# Altium PCB V2.1.PcbDoc (part 2 of 3)
Units mil, origin at the board's own origin, x right, y up, seen from the top; angles counter-clockwise.
Board outline 6653.54 x 3031.5 mil, 4 copper layers (Top Layer, 地, 电源, Bottom Layer); 355 components, 238 nets, 1139 pads, 340 vias.
Unrouted connection lines stored in the file: 1.
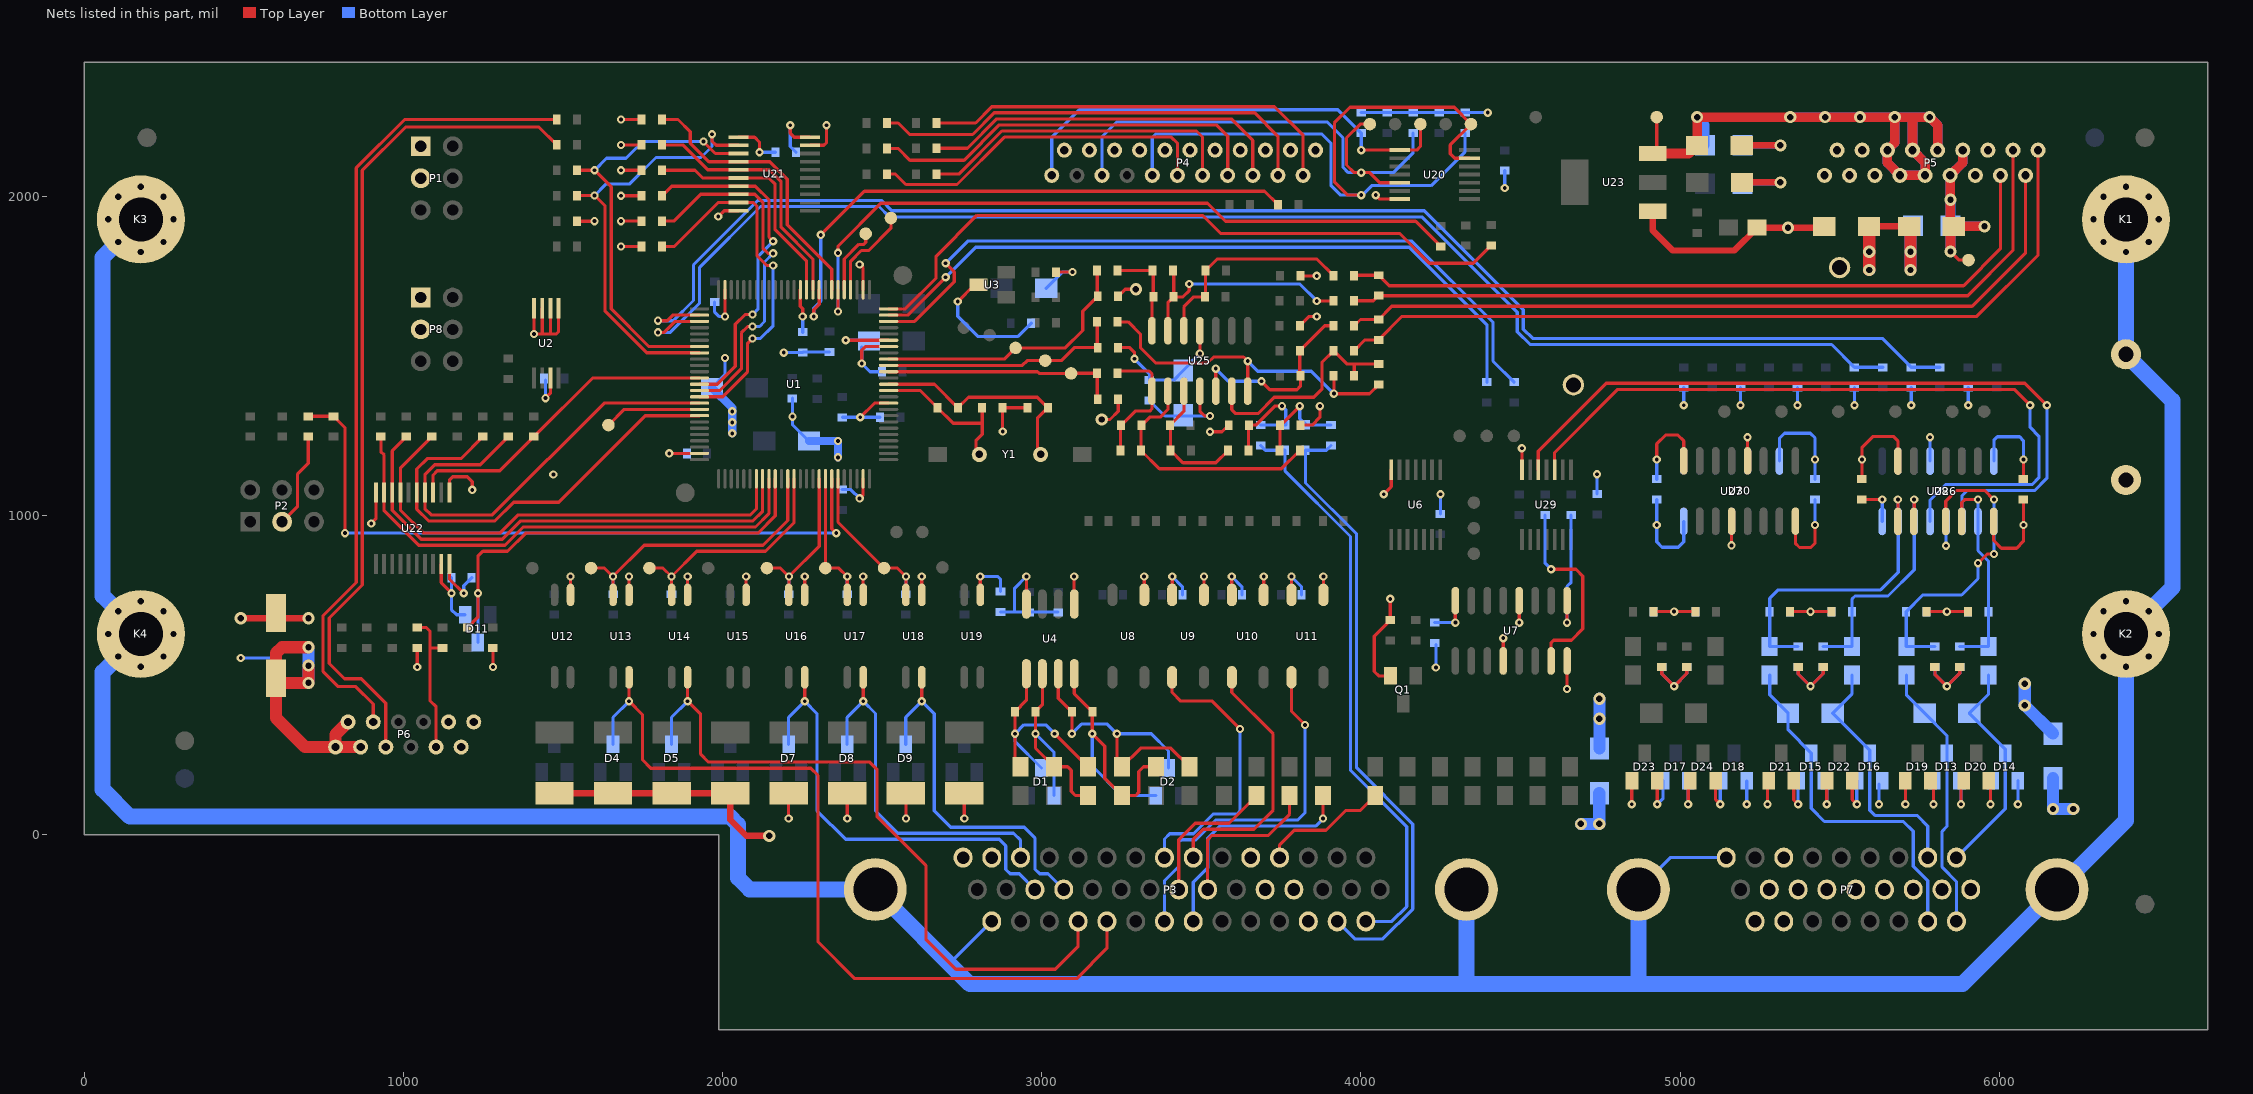
[diagram p4: the nets of this part, all layers, seen from the top]

## Via types
v1: diameter 26, hole 12, Top Layer to Bottom Layer, 308 vias
v2: diameter 38, hole 20, Top Layer to Bottom Layer, 32 vias

## Nets (pads, with @x,y where several pads share a name; then routed paths per layer and width w, separated by ;. In a path a pad name is that pad's centre, name@x,y a point inside that pad or via, vN(x,y) a via of type N, cw(c..) or ccw(c..) an arc to the next point about the centre after c; other vN are vias at no path point) (continued)
5V: C15.2 C18.1 C20.1 C21.1 C22.1 C24.1 C25.2 C47.1 C48.1 C56.1 C57.1 C64.1 C65.1 C66.1 D13.2 D14.2 D15.2 D16.2 D17.2 D18.2 D19.2 D20.2 D21.2 D22.2 D23.2 D24.2 P5.9 P5.10 P5.11 P5.12 P5.13 P6.1 P6.2 P6.3 P7.7 P7.16 P7.17 P7.25 P7.26 R14.2 R15.2 R52.2 R53.2 R54.2 R55.2 R56.2 R67.1 R131.2 R136.2 R137.1 R147.2 R148.1 R155.2 R156.1 R165.2 R166.1 R173.2 R174.1 R181.2 TP36.1 U4.8 U7.4 U7.16 U8.1 U9.1 U10.1 U11.1 U21.20 U22.20 U23.3 U26.14 U27.14 U28.4 U28.16 U30.4 U30.16 | length 8836.3
  Top Layer w10: v1(1043.5,526.31) R67.1@1043.5,585.81 ; U22.20@1144.16,849.11 1144.16,802.16 v1(1189,757.31) ; v1(2212,2223.81) 2212,2199.31 2224.84,2186.47 U21.20@2274.2,2186.47 ; U4.8@2952,723.82 v1(2952,809.86) ; U8.1@3321,752.86 v1(3321,809.86) ; U9.1@3508.5,752.36 v1(3508.5,809.86) ; U10.1@3695.5,752.36 v1(3695.5,809.86) ; U11.1@3882.5,752.36 v1(3882.5,809.86) ; v1(4296,665.39) U7.16@4296,734.29 ; U7.4@4446,545.5 v1(4446,616.81) ; R181.2@4916.67,699.81 v1(4981.5,699.81) R174.1@5048.02,699.81 ; v1(4927,1176.81) 4927,1225.44 4954.87,1253.31 4993,1253.31 5011.59,1234.72 U30.16@5011.59,1172.38 ; U23.3@4927,2148.42 TP36.1@4927,2249.31 ; v1(4928.5,96.32) D23.2@4928.5,169.73 ; D24.2@5111.33,169.89 5111.33,110.98 v1(5126,96.32) ; v1(5161.5,907.39) U30.4@5161.5,983.31 ; R173.2@5345.17,699.81 v1(5408.75,699.81) R166.1@5475.02,699.81 ; D21.2@5356.58,169.89 5356.58,109.73 v1(5370,96.32) ; D22.2@5539.33,169.89 5539.33,110.98 v1(5554,96.32) ; C56.1@5570,1114.81 v1(5570,1176.81) 5570,1213.31 5605.5,1248.81 5668.5,1248.81 5682.59,1234.72 U26.14@5682.59,1171.38 ; R165.2@5772.67,699.81 v1(5836,699.81) R156.1@5902.52,699.81 ; v1(5794.5,96.32) D19.2@5794.5,160.23 ; v1(5972.5,96.32) D20.2@5972.5,164.73 ; C47.1@6076,1114.81 v1(6076,1176.81)
  Top Layer w30: U23.3@4914,2135.42 5027.62,2135.42 C25.2@5053.09,2160.89 ; C25.2@5053.5,2161.3 v2(5053.5,2249.31) v2(5345.5,2249.31) v2(5454.62,2249.31) v2(5563.75,2249.31) v2(5672.88,2249.31) ; 5728.35,2248.97 P5.11@5728.35,2145.67 5767.72,2106.3 P5.10@5767.72,2066.93 P5.12@5688.98,2066.93 5649.61,2106.3 P5.13@5649.61,2145.67 5672.88,2168.94 v2(5672.88,2249.31) ; P5.9@5807.09,2145.67 5807.09,2224.23 v2(5782,2249.31) v2(5672.88,2249.31)
  Top Layer w38: v2(702.5,530.81) v2(702.5,476.82) 615.17,476.82 C22.1@601.09,490.89 ; v2(702.5,588.31) 619.5,588.31 601.09,569.91 C22.1@601.09,490.89 ; P6.2@826.77,354.33 787.4,314.96 P6.1@787.4,275.59 ; P6.3@866.14,275.59 P6.1@787.4,275.59 ; C22.1@601.09,490.89 601.09,366.41 691.91,275.59 P6.1@787.4,275.59
  Bottom Layer w10: C24.1@601.09,490.89 615.17,476.82 v2(702.5,476.82) ; v1(1189,757.31) 1189,781.31 C21.1@1214,806.31 ; v1(2212,2223.81) 2212,2157.31 C20.1@2230,2139.31 ; C15.2@2871,699.16 2915,699.16 ; v1(2952,809.86) 2915,772.86 2915,699.16 ; R15.2@3050.25,699.16 2915,699.16 ; R52.2@4001,2263.31 R53.2@4082.4,2263.31 R54.2@4163.8,2263.31 R55.2@4245.2,2263.31 R56.2@4326.6,2263.31 v1(4397.5,2263.31) ; C18.1@4231.16,665.39 v1(4296,665.39) ; R155.2@4916.67,699.81 v1(4981.5,699.81) R148.1@5048.02,699.81 ; C57.1@4927,1114.81 v1(4927,1176.81) ; v1(4928.5,96.32) 4946.85,114.67 D17.2@4946.85,169.89 ; v1(5126,96.32) D18.2@5126,166.04 ; U27.14@5311.59,1171.38 5311.59,1242.91 5327.5,1258.81 5408.5,1258.81 5423,1244.31 v1(5423,1176.81) C48.1@5423,1114.81 ; R147.2@5345.09,699.89 5345.17,699.81 v1(5408.75,699.81) 5475.02,699.81 R137.1@5475.09,699.89 ; v1(5370,96.32) D15.2@5370,168.04 ; v1(5554,96.32) D16.2@5554,169.04 ; R136.2@5772.59,699.89 5772.67,699.81 v1(5836,699.81) 5902.52,699.81 R131.2@5902.59,699.89 ; v1(5794.5,96.32) D13.2@5794.5,167.54 ; v1(5833.5,906.39) U28.4@5833.5,982.31 ; v1(5972.5,96.32) D14.2@5972.5,162.54 ; U28.16@5983.59,1171.38 5983.59,1236.91 5994.5,1247.81 6064,1247.81 6076,1235.81 v1(6076,1176.81)
  Bottom Layer w30: v2(5053.5,2249.31) 5077.74,2225.07 C66.1@5077.74,2160.81 ; v2(5345.5,2249.31) v2(5454.62,2249.31) v2(5563.75,2249.31) v2(5672.88,2249.31) ; 5728.35,2248.66 P5.11@5728.35,2145.67 5767.72,2106.3 P5.10@5767.72,2066.93 P5.12@5688.98,2066.93 5649.61,2106.3 P5.13@5649.61,2145.67 5672.88,2168.94 v2(5672.88,2249.31) ; P5.9@5807.09,2145.67 5807.09,2224.23 v2(5782,2249.31) v2(5672.88,2249.31)
  Bottom Layer w38: v2(702.5,476.82) v2(702.5,530.81) v2(702.5,588.31) ; v2(4689.34,34.89) v2(4747.09,34.89) C64.1@4747.09,130.65 ; C65.1@6168.59,177.65 v2(6168.59,81.39) v2(6232.09,81.39)
5VA: C31.2 C42.2 C43.2 C67.1 P5.7 P5.8 TP37.1 U25.4 | length 1225.7
  Top Layer w10: U25.4@3495.5,1390.83 3495.5,1327.81 3510.5,1312.81 v1(3527,1312.81) ; v2(5847.5,1828.31) 5874.5,1801.31 TP37.1@5904,1801.31
  Top Layer w30: C31.2@5846.46,1918.37 P5.8@5846.46,2066.93 5885.83,2106.3 P5.7@5885.83,2145.67 ; v2(5847.5,1828.31) C31.2@5847.5,1896.33 ; C31.2@5858,1906.83 v2(5954,1906.81)
  Bottom Layer w10: C43.2@3337.5,1361.31 3386,1312.81 v1(3527,1312.81)
  Bottom Layer w30: v2(5847.5,1828.31) v2(5847.5,1990.31) 5846.46,1991.36 P5.8@5846.46,2066.93 5885.83,2106.3 P5.7@5885.83,2145.67 ; C67.1@5848,1906.81 v2(5954,1906.81)
A+: D13.3 P7.19 R133.2 R134.1 | length 849.3
  Bottom Layer w10: R134.1@5709.22,500.89 5709.22,438.89 R133.2@5766.72,381.39 5836.22,311.89 D13.3@5836.22,256.51 5836.22,26.54 5821,11.32 5821,-100.68 5866.11,-145.79 P7.19@5866.11,-270.79
A+_2_26LS32: C50.1 R134.2 R136.1 U26.4 U28.1 | length 985.8
  Top Layer w10: U26.4@5832.59,982.41 5832.59,1045.78 5866.13,1079.31 5955.17,1079.31 v1(5983.59,1050.89) ; v1(5933.59,851.89) 5962.09,880.39 v1(5983.59,880.39)
  Bottom Layer w10: R134.2@5708.59,591.52 R136.1@5708.59,699.89 5760.59,751.89 5882.09,751.89 5933.59,803.39 v1(5933.59,851.89) ; R134.2@5709.22,590.89 C50.1@5797.94,590.89 ; v1(5983.59,880.39) U28.1@5983.59,982.41 v1(5983.59,1050.89)
A-: D14.3 P7.1 R132.1 R133.1 | length 706.5
  Bottom Layer w10: P7.1@5866.11,-70.79 6019.22,82.33 D14.3@6019.22,256.51 6019.22,268.89 R133.1@5906.72,381.39 5966.59,441.26 R132.1@5966.59,500.89
A-_2_26LS32: C49.2 R131.1 R132.2 U26.5 U28.2 | length 677.2
  Top Layer w10: U26.5@5882.59,982.41 5882.59,1041.78 5891.71,1050.89 v1(5933.59,1050.89)
  Bottom Layer w10: C49.2@5876.59,590.23 R132.2@5965.94,590.23 ; v1(5933.59,1050.89) U28.2@5933.59,982.41 5933.59,891.22 5966.59,858.22 R131.1@5966.59,699.89 R132.2@5966.59,590.89
A_2_26LS31: R163.1 U7.9 | length 411.2
  Top Layer w10: v1(4646,665.39) U7.9@4646,734.29
  Bottom Layer w10: v1(4646,665.39) 4646,778.81 4658.67,791.48 R163.1@4658.67,1002.47
A_2_ARM: R169.1 U1.23 | length 2390.6
  Top Layer w10: U1.23@2520.26,1609.17 2601.85,1609.17 2726,1733.31 2726,1764.31 v1(2699,1791.31)
  Bottom Layer w10: v1(2699,1791.31) 2768.5,1860.81 4159.78,1860.81 4414,1606.6 4414,1484.81 R169.1@4480,1418.81
A_2_LVC14: U28.3 U29.5 | length 2366
  Top Layer w10: U29.5@4556,1144.52 4556,1202.32 4769,1415.31 6080.5,1415.31 v1(6149.5,1346.31)
  Bottom Layer w10: U28.3@5883.59,982.41 5883.59,1062.78 5900.13,1079.31 6111.63,1079.31 6149.5,1117.19 v1(6149.5,1346.31)
A_TEST_2_ARM: R121.1 R122.2 U1.53 | length 4454.8
  Top Layer w10: v1(1798,1574.81) 1817,1574.81 1851.35,1609.17 U1.53@1927.74,1609.17
  Bottom Layer w10: v1(1798,1574.81) 1836,1574.81 1928,1666.81 1928,1778.43 2118.89,1969.31 2490.26,1969.31 2522.76,1936.81 4191.26,1936.81 4490,1638.07 4490,1576.93 4530.11,1536.81 5474.79,1536.81 R121.1@5546.29,1465.31 R122.2@5635.43,1465.31
ALM: R81.1 U1.68 U22.5 | length 1412.9
  Top Layer w10: R81.1@1249.02,1247.89 1180.44,1179.31 1074.47,1179.31 1041.8,1146.64 U22.5@1041.8,1073.52 1041.8,1021 1078.98,983.81 1286.76,983.81 1345.76,1042.81 1486.5,1042.81 1757.57,1313.89 U1.68@1927.74,1313.89
ALM+: P3.23 R33.2 | length 457.5
  Top Layer w10: P3.23@3429.49,-170.79 3429.49,-14.71 3481.09,36.89 3586.84,36.89 R33.2@3673.59,123.65
ALM-: P3.8 U9.3 | length 896.6
  Top Layer w10: U9.3@3408.59,494.39 3408.59,446.39 3435.59,419.39 3534.09,419.39 v1(3621.59,331.89)
  Bottom Layer w10: P3.8@3384.61,-70.79 3384.61,-12.59 3401.09,3.89 3475.46,3.89 3537.46,65.89 3612.09,65.89 3621.59,75.39 v1(3621.59,331.89)
ALM_2_OPTO: R88.2 U9.2 | length 127.9
  Top Layer w10: U9.2@3409,752.67 v1(3409,809.86)
  Bottom Layer w10: v1(3409,809.86) 3440.67,778.2 R88.2@3440.67,752.31
ALRS: D4.3 P3.40 U13.2 | length 2600.9
  Top Layer w10: U13.2@1707.02,494.39 v1(1707.05,418.89) 1749.09,376.85 1749.09,235.39 1775.09,209.39 2276.59,209.39 2299.09,186.89 2299.09,-335.11 2414.09,-450.11 3109.59,-450.11 3204.3,-355.41 P3.40@3204.3,-270.79
  Bottom Layer w10: D4.3@1656.65,284.01 1656.65,368.5 v1(1707.05,418.89)
ALRS_2_ARM: R39.2 TP28.1 U1.87 U13.4 | length 942.7
  Top Layer w10: TP28.1@1588,836.31 1630.05,836.31 v1(1656.5,809.86) ; U13.4@1656.5,752.79 v1(1656.5,809.86) ; U1.87@2204.31,1116.06 2204.31,985.5 2126.82,908 1754.64,908 v1(1656.5,809.86)
  Bottom Layer w10: R39.2@1656.5,754.81 v1(1656.5,809.86)
ARM_2_OUT1: R85.1 U1.84 U22.9 | length 1636.8
  Top Layer w10: R85.1@929.59,1247.89 929.59,1200.72 939.43,1190.88 U22.9@939.43,1073.52 939.43,1015.88 1047.5,907.81 1318.24,907.81 1375.43,965 2103.21,965 2145.26,1007.05 U1.84@2145.26,1116.06
ARM_2_OUT2: R84.1 U1.83 U22.8 | length 1585.1
  Top Layer w10: R84.1@1009.45,1247.89 965.02,1203.47 U22.8@965.02,1073.52 965.02,1017.16 1055.37,926.81 1310.37,926.81 1367.56,984 2095.34,984 2125.57,1014.24 U1.83@2125.57,1116.06
ARM_2_OUT3: R83.1 U1.82 U22.7 | length 1541.6
  Top Layer w10: R83.1@1089.31,1247.89 990.61,1149.2 U22.7@990.61,1073.52 990.61,1018.44 1063.24,945.81 1302.5,945.81 1359.69,1003 2087.47,1003 2105.89,1021.42 U1.82@2105.89,1116.06
AS: C35.2 R100.2 TP22.1 U1.15 | length 734.4
  Top Layer w10: U1.15@2520.26,1451.68 2986.63,1451.68 2992,1446.31 TP22.1@3092,1446.31 ; TP22.1@3092,1446.51 R100.2@3173.73,1446.51 C35.2@3173.73,1367.77
AS+: P3.32 R98.1 R101.1 | length 1961.3
  Bottom Layer w10: R98.1@3906.5,1220.31 3892,1205.81 R101.1@3826.66,1205.81 3826.66,1103.03 3986.5,943.18 3986.5,210.18 4162.5,34.18 4162.5,-232.06 4068.87,-325.68 3980.45,-325.68 P3.32@3925.55,-270.79
AS-: P3.31 R101.2 R102.1 | length 1817
  Bottom Layer w10: R102.1@3686.5,1220.31 3701,1205.81 R101.2@3762.66,1205.81 3762.66,1140.16 3967.5,935.31 3967.5,202.32 4143.5,26.32 4143.5,-224.18 4096.9,-270.79 P3.31@4015.71,-270.79
B+: D15.3 P7.20 R141.2 R142.1 | length 1121.7
  Bottom Layer w10: R142.1@5280.97,500.89 5280.97,438.89 R141.2@5338.47,381.39 5338.47,329.26 D15.3@5411.22,256.51 5411.22,83.59 5452.5,42.32 5700,42.32 5730.5,11.82 5730.5,-97.68 5775.95,-143.13 P7.20@5775.95,-270.79
B+_2_26LS32: C53.1 R142.2 R147.1 U26.1 U28.7 | length 971.1
  Top Layer w10: U26.1@5682.59,982.41 v1(5682.59,1050.89)
  Bottom Layer w10: R147.1@5280.97,699.77 R142.2@5280.97,590.89 C53.1@5369.94,590.89 ; R147.1@5281.09,699.89 5281.09,741.39 5307.59,767.89 5628.59,767.89 5683.59,822.89 U28.7@5683.59,982.41 ; U28.7@5682.59,983.41 v1(5682.59,1050.89)
B-: D16.3 P7.2 R139.1 R141.1 | length 797.1
  Bottom Layer w10: R139.1@5538.59,500.89 5538.59,441.51 R141.1@5478.47,381.39 5594.22,265.64 D16.3@5594.22,256.51 5594.22,77.59 5610.5,61.32 5742.5,61.32 5775.95,27.87 P7.2@5775.95,-70.79
B-_2_26LS32: C52.2 R137.2 R139.2 U26.2 U28.6 | length 757.5
  Top Layer w10: U26.2@5733.59,983.41 v1(5733.59,1050.89)
  Bottom Layer w10: C52.2@5448.59,590.23 R139.2@5537.94,590.23 ; R139.2@5539.09,591.39 R137.2@5539.09,699.89 5539.09,739.89 5548.09,748.89 5651.59,748.89 5733.59,830.89 U28.6@5733.59,982.41 v1(5733.59,1050.89)
B_2_26LS31: R154.1 U7.7 | length 625.9
  Top Layer w10: U7.7@4596.09,545.41 4596.09,602.91 4603.58,610.39 4660.08,610.39 4695.5,645.81 4695.5,810.81 4673.92,832.39 v1(4596.1,832.39)
  Bottom Layer w10: R154.1@4577.33,1002.47 4577.33,851.16 v1(4596.1,832.39)
B_2_ARM: R159.1 U1.24 | length 2243.6
  Top Layer w10: U1.24@2520.26,1628.85 2580.04,1628.85 v1(2699,1747.81)
  Bottom Layer w10: v1(2699,1747.81) 2793,1841.81 4151.91,1841.81 4395,1598.72 R159.1@4395,1418.81
B_2_LVC14: U28.5 U29.3 | length 2322.1
  Top Layer w10: U29.3@4607.19,1144.52 4607.19,1198.5 4805,1396.31 6047,1396.31 v1(6097,1346.31)
  Bottom Layer w10: U28.5@5783.59,982.41 5783.59,1049.78 5832.13,1098.31 6103.76,1098.31 6124.5,1119.06 6124.5,1249.94 6097,1277.44 v1(6097,1346.31)
B_TEST_2_ARM: R119.1 R120.2 U1.52 | length 4626.5
  Top Layer w10: v1(1798,1611.56) 1826.25,1611.56 1843.54,1628.85 U1.52@1927.74,1628.85
  Bottom Layer w10: v1(1798,1611.56) 1845.88,1611.56 1909,1674.68 1909,1786.3 2111.02,1988.31 2498.13,1988.31 2530.63,1955.81 4199.13,1955.81 4509,1645.94 4509,1584.8 4537.98,1555.81 5634.06,1555.81 R119.1@5724.56,1465.31 R120.2@5813.7,1465.31
BOOT0: R9.1 R10.1 U1.94 | length 2175
  Top Layer w10: R10.1@702,1311.89 R9.1@781,1311.89 817,1275.89 v1(817,945.81) ; U1.94@2342.11,1116.06 2342.11,959.7 v1(2356,945.81)
  Bottom Layer w10: v1(817,945.81) v1(2356,945.81)
BOOT1: R1.1 U1.37 | length 136.3
  Top Layer w10: U1.37@2243.69,1708.57 2243.69,1656.63 2251,1649.31 v1(2251,1624.81)
  Bottom Layer w10: R1.1@2251,1575.31 v1(2251,1624.81)
BR: P4.14 R56.1 TP9.1 U20.13 | length 2316.2
  Top Layer w10: v1(4001,2004.81) 3959,2004.81 3917,2046.81 3917,2231.18 3965.82,2280 4292.31,2280 TP9.1@4345,2227.31 4280,2162.31 4280,2134.31 4293.82,2120.5 U20.13@4340.25,2120.5
  Bottom Layer w10: P4.14@3346.46,2066.93 3346.46,2185.27 3357.5,2196.31 3878,2196.31 3906,2168.31 3906,2035.81 3937,2004.81 v1(4001,2004.81) 4003.93,2004.81 4033.93,2034.81 4220,2034.81 4326.6,2141.41 R56.1@4326.6,2199.31
BR_2_ARM: R135.1 U1.25 | length 2134.3
  Top Layer w10: U1.25@2520.26,1648.54 2572.41,1648.54 2669,1745.13 2669,1813.31 2797,1941.31 3503.76,1941.31 3560.26,1884.81 4121.13,1884.81 4214.63,1791.31 4352,1791.31 R135.1@4408,1847.31
BRK: R79.1 U1.62 U22.3 | length 1015.1
  Top Layer w10: U22.3@1092.98,1073.52 1092.98,1127.92 1106.37,1141.31 1302.16,1141.31 R79.1@1408.74,1247.89 1592.84,1432 U1.62@1927.74,1432
BRK+: P3.37 R35.2 | length 738.7
  Top Layer w10: v1(3881.59,51.39) R35.2@3881.59,123.65
  Bottom Layer w10: P3.37@3474.77,-270.79 3474.77,-147.93 3520.09,-102.61 3520.09,-10.11 3558.09,27.89 3858.09,27.89 v1(3881.59,51.39)
BRK-: P3.38 U11.3 | length 1143
  Top Layer w10: U11.3@3782.59,494.39 3782.59,387.39 v1(3825.09,344.89)
  Bottom Layer w10: P3.38@3384.61,-270.79 3384.61,-143.59 3428.59,-99.61 3428.59,-23.61 3437.09,-15.11 3483.33,-15.11 3545.33,46.89 3802.59,46.89 3825.09,69.39 v1(3825.09,344.89)
BRK_2_OPTO: R86.2 U11.2 | length 128.1
  Top Layer w10: U11.2@3782.5,752.36 v1(3782.5,809.86)
  Bottom Layer w10: v1(3782.5,809.86) 3814,778.36 R86.2@3814,752.31
CH1: R71.1 U1.63 U21.7 | length 1090.4
  Top Layer w10: R71.1@1810.59,2003.09 1840.43,2032.93 U21.7@2049.8,2032.93 2102.39,2032.93 2145.5,1989.81 2145.5,1873.31 v1(2158.5,1860.31) ; U1.63@1927.74,1412.31 1984,1412.31 2040,1468.31 2040,1600.31 2070.5,1630.81 v1(2094,1630.81)
  Bottom Layer w10: v1(2094,1630.81) 2111.5,1648.31 2111.5,1813.5 2158.32,1860.31 v1(2158.5,1860.31)
CH1_2_IPM: P4.8 R65.2 | length 1265
  Top Layer w10: R65.2@2515.59,2150.89 2550.42,2150.89 2587,2114.31 2756.76,2114.31 2867.26,2224.81 3547,2224.81 3582.68,2189.14 P4.8@3582.68,2066.93
CH1N: R68.1 U1.32 U21.4 | length 894.3
  Top Layer w10: R68.1@1810.59,2241.89 1860.42,2241.89 1899,2203.31 1899,2167.99 1957.29,2109.7 U21.4@2049.8,2109.7 2147.85,2109.7 2202.5,2055.06 2202.5,1912.06 2342.11,1772.44 U1.32@2342.11,1708.57
CH1N_2_IPM: P4.2 R62.2 | length 1331.9
  Top Layer w10: R62.2@2670.59,2230.89 2792.73,2230.89 2843.65,2281.81 3729.5,2281.81 3818.9,2192.42 P4.2@3818.9,2066.93
CH2: R72.1 U1.64 U21.8 | length 1127.7
  Top Layer w10: R72.1@1810.59,1923.49 1847.68,1923.49 1931.52,2007.34 U21.8@2049.8,2007.34 2101.11,2007.34 2126.5,1981.94 2126.5,1838.31 2142.5,1822.31 v1(2158.5,1822.31) ; U1.64@1927.74,1392.63 1991.31,1392.63 2059,1460.31 2059,1573.31 2079,1593.31 v1(2094,1593.31)
  Bottom Layer w10: v1(2094,1593.31) 2116,1593.31 2131.5,1608.81 2131.5,1795.5 2158.32,1822.31 v1(2158.5,1822.31)
CH2_2_IPM: P4.10 R66.2 | length 1017
  Top Layer w10: R66.2@2670.59,2070.89 2740.21,2070.89 2875.13,2205.81 3485,2205.81 3503.94,2186.88 P4.10@3503.94,2066.93
CH2N: R69.1 U1.35 U21.5 | length 800.4
  Top Layer w10: R69.1@1810.59,2162.29 1875.02,2162.29 1953.2,2084.11 U21.5@2049.8,2084.11 2146.57,2084.11 2183.5,2047.18 2183.5,1904.18 2283.06,1804.63 U1.35@2283.06,1708.57
CH2N_2_IPM: P4.4 R63.2 | length 1420.7
  Top Layer w10: R63.2@2515.59,2230.89 2549.92,2230.89 2586,2194.81 2783.52,2194.81 2851.52,2262.81 3667,2262.81 3740.16,2189.66 P4.4@3740.16,2066.93
CH3: R73.1 U1.65 U21.9 | length 1141.7
  Top Layer w10: R73.1@1810.59,1843.89 1848.58,1843.89 1986.43,1981.75 U21.9@2049.8,1981.75 2096.57,1981.75 2107.5,1970.81 2107.5,1815.81 2139,1784.31 v1(2158.5,1784.31) ; U1.65@1927.74,1372.94 2000.63,1372.94 2078,1450.31 2078,1539.81 v1(2094,1555.81)
  Bottom Layer w10: v1(2094,1555.81) 2118.76,1555.81 2158.5,1595.56 v1(2158.5,1784.31)
CH3_2_IPM: P4.12 R74.2 | length 1093.5
  Top Layer w10: R74.2@2515.59,2070.89 2541.92,2070.89 2574.5,2038.31 2734.5,2038.31 2883,2186.81 3406.5,2186.81 3425.2,2168.12 P4.12@3425.2,2066.93
CH3N: R70.1 U1.36 U21.6 | length 743.6
  Top Layer w10: R70.1@1810.59,2082.69 1913.62,2082.69 1937.8,2058.52 U21.6@2049.8,2058.52 2145.3,2058.52 2164.5,2039.31 2164.5,1896.31 2263.37,1797.44 U1.36@2263.37,1708.57
CH3N_2_IPM: P4.6 R64.2 | length 1166.3
  Top Layer w10: R64.2@2670.59,2151.89 2767.47,2151.89 2859.39,2243.81 3594,2243.81 3661.42,2176.4 P4.6@3661.42,2066.93
CLE/SC1/ZEROSPD: D7.3 P3.28 U16.2 | length 1418.4
  Top Layer w10: v1(2257.4,418.89) U16.2@2257.4,494.3
  Bottom Layer w10: D7.3@2206.94,284.01 2206.94,368.43 v1(2257.4,418.89) 2295.59,380.7 2295.59,76.39 2385.59,-13.61 2867.09,-13.61 2887.59,-34.11 2887.59,-108.11 2901.09,-121.61 2929.52,-121.61 P3.28@2978.7,-170.79
CLE/SC1/ZEROSPD_2_ARM: R45.2 TP31.1 U1.92 U16.4 | length 537.8
  Top Layer w10: TP31.1@2139,836.31 2181.55,836.31 v1(2208,809.86) ; U16.4@2208,752.96 v1(2208,809.86) ; U1.92@2302.74,1116.06 2302.74,904.6 v1(2208,809.86)
  Bottom Layer w10: R45.2@2208,754.31 v1(2208,809.86)
CLK: TP2.1 U1.67 | length 305.6
  Top Layer w10: TP2.1@1642.5,1284.31 1691.76,1333.57 U1.67@1927.74,1333.57
COIN: R80.1 U1.66 U22.4 | length 1431.2
  Top Layer w10: R80.1@1328.88,1247.89 1241.3,1160.31 1098.5,1160.31 1067.39,1129.2 U22.4@1067.39,1073.52 1067.39,1022.28 1086.85,1002.81 1278.89,1002.81 1629.33,1353.26 U1.66@1927.74,1353.26
COIN+: P3.22 R34.2 | length 504.6
  Top Layer w10: P3.22@3519.65,-170.79 3519.65,-14.55 3532.59,-1.61 3709.59,-1.61 3776.59,65.39 R34.2@3776.59,123.65
COIN-: P3.7 U10.3 | length 815.4
  Top Layer w10: P3.7@3474.77,-70.79 3474.77,-13.93 3506.59,17.89 3665.09,17.89 3725.09,77.89 3725.09,316.89 3595.59,446.39 U10.3@3595.59,494.39
COIN_2_OPTO: R87.2 U10.2 | length 128.2
  Top Layer w10: U10.2@3595.5,752.36 v1(3595.5,809.86)
  Bottom Layer w10: v1(3595.5,809.86) 3627.33,778.03 R87.2@3627.33,752.31
COM+: P3.14 P3.15 R36.2 R38.2 R40.2 R42.2 R44.2 R46.2 R48.2 R50.2 | length 1095.3
  Top Layer w10: v1(2207.09,51.39) R44.2@2207.09,130.94 ; v1(2390.59,51.39) R46.2@2390.59,131.01 ; v1(2574.59,51.39) R48.2@2574.59,130.72 ; v1(2757.59,51.39) R50.2@2757.59,131.15
  Top Layer w20: R36.2@1473.59,131.15 R42.2@2023.88,131.15 2023.88,47.93 2074.5,-2.68 v2(2146.5,-2.68)
CZ: P3.4 R29.1 | length 403.7
  Top Layer w10: P3.4@3745.24,-70.79 3745.24,-30.96 3791.09,14.89 3890.84,14.89 3952.84,76.89 3998.34,76.89 R29.1@4045.09,123.65
DA1: TP1.1 U1.29 | length 290.4
  Top Layer w10: U1.29@2401.17,1708.57 2401.17,1797.66 2435,1831.5 2458.31,1831.5 2527.5,1900.68 TP1.1@2527.5,1933
DA2: TP40.1 U1.30 | length 212.2
  Top Layer w10: U1.30@2381.48,1708.57 2381.48,1804.85 2427.13,1850.5 2442.5,1850.5 2448.5,1856.5 TP40.1@2448.5,1884
FIL: D9.3 P3.27 U18.2 | length 1155.3
  Top Layer w10: v1(2624.31,418.89) U18.2@2624.31,494.25
  Bottom Layer w10: D9.3@2573.8,284.01 2573.8,368.38 v1(2624.31,418.89) 2663.59,379.61 2663.59,75.39 2714.59,24.39 2945.09,24.39 2978.59,-9.11 2978.59,-106.61 2993.59,-121.61 3019.68,-121.61 P3.27@3068.86,-170.79
FIL_2_ARM: R49.2 TP33.1 U1.95 U18.4 | length 531.2
  Top Layer w10: U1.95@2361.8,1116.06 2361.8,980.52 TP33.1@2506,836.31 2548.05,836.31 v1(2574.5,809.86) U18.4@2574.5,752.6
  Bottom Layer w10: R49.2@2574.5,754.81 v1(2574.5,809.86)
FSTP: D5.3 P3.41 U14.2 | length 2206
  Top Layer w10: U14.2@1890.5,494.35 v1(1890.5,418.89) 1931.09,378.3 1931.09,253.39 1956.09,228.39 2461.59,228.39 2483.59,206.39 2483.59,58.39 2637.09,-95.11 2637.09,-326.61 2731.09,-420.61 3042.59,-420.61 3114.14,-349.06 P3.41@3114.14,-270.79
  Bottom Layer w10: D5.3@1840.08,284.01 1840.08,368.48 v1(1890.5,418.89)
FSTP_2_ARM: R41.2 TP29.1 U1.88 U14.4 | length 784.2
  Top Layer w10: TP29.1@1771,836.31 1813.55,836.31 v1(1840,809.86) ; U14.4@1840,752.72 v1(1840,809.86) ; U1.88@2224,1116.06 2224,978.31 2134.69,889 1919.14,889 v1(1840,809.86)
  Bottom Layer w10: R41.2@1840,754.31 v1(1840,809.86)
GNDA: C27.1 C28.1 C29.1 C30.1 C31.1 C33.1 C35.1 C36.1 C39.1 C41.1 C42.1 C43.1 C45.1 C67.2 L2.1 P3.20 P3.33 P5.5 P5.6 R95.1 R112.1 TP39.1 U1.19 U1.20 U3.3 U25.11 | length 2422
  Top Layer w10: v1(2386,1550.11) U1.20@2520.26,1550.11 ; v1(2436,1477.31) 2436,1518.81 2447.61,1530.43 U1.19@2520.26,1530.43 ; v1(2737,1671.31) U3.3@2789.37,1723.69 ; R95.1@3045,1763.81 v1(3096.5,1763.81) ; v2(3188,1301.81) 3214,1301.81 3239.57,1327.39 C35.1@3239.57,1365.93 ; C39.1@3239.57,1527.08 3275.73,1527.08 3290.5,1512.31 v1(3290.5,1492.31) ; C45.1@3239.57,1688.24 3261.15,1709.81 v2(3295,1709.81) ; v1(3495.5,1508.31) U25.11@3495.5,1579.8 ; v1(3527,1263.31) 3565.05,1263.31 C36.1@3586.05,1284.31 ; R112.1@3808.66,1595.51 3837.97,1624.81 v1(3862,1624.81) ; C33.1@3810.5,1284.31 3847.5,1284.31 3871.5,1308.31 v1(3871.5,1343.81) ; C41.1@3810.5,1751.81 v1(3862,1751.81)
  Top Layer w20: L2.1@5592,1906.83 C31.1@5718,1906.83
  Top Layer w38: L2.1@5592,1906.83 5593,1905.83 v2(5593,1827.31) v2(5593,1770.31) ; v2(5722,1770.31) v2(5722,1827.31) C31.1@5722,1902.83
  Bottom Layer w10: v1(2386,1550.11) C27.1@2457.2,1550.11 ; C27.1@2436,1528.9 v1(2436,1477.31) 2462,1451.31 C28.1@2500,1451.31 ; v1(2737,1671.31) 2737,1624.81 2799.5,1562.31 2926,1562.31 C30.1@2967,1603.31 ; C29.1@3014,1713.31 3064.5,1763.81 v1(3096.5,1763.81) ; v1(3290.5,1492.31) 3337.5,1445.31 C43.1@3337.5,1425.31 3413.5,1425.31 C42.1@3443.5,1455.31 3495.5,1507.31 v1(3495.5,1508.31)
  Bottom Layer w38: v2(5722,1770.31) C67.2@5722,1901.93
GNDD: C1.2 C2.2 C3.2 C4.1 C5.2 C6.2 C7.2 C8.2 C9.2 C10.2 C11.2 C12.2 C13.2 C15.1 C17.2 C18.2 C19.2 C20.2 C21.2 C22.2 C23.2 C24.2 C25.1 C26.1 C47.2 C48.2 C49.1 C50.2 C51.2 C52.1 C53.2 C54.1 C55.2 C56.2 C57.2 C58.1 C59.2 C60.1 C61.2 C62.1 C63.2 C64.2 C65.2 C66.2 D11.1 D12.2 D13.1 D14.1 D15.1 D16.1 D17.1 D18.1 D19.1 D20.1 D21.1 D22.1 D23.1 D24.1 L2.2 P1.1 P1.3 P2.3 P3.5 P3.19 P4.1 P4.3 P4.5 P4.7 P4.9 P4.11 P4.13 P4.15 P4.17 P4.19 P4.21 P5.14 P5.15 P5.16 P5.17 P5.18 P6.10 P6.11 P6.12 P7.10 P7.11 P7.12 P7.13 P7.14 P7.15 P8.1 P8.3 Q1.2 R1.2 R6.1 R10.2 R31.2 R68.2 R69.2 R70.2 R71.2 R72.2 R73.2 R77.1 R119.2 R121.2 R124.2 R125.2 R127.2 R130.2 TP38.1 U1.10 U1.27 U1.49 U1.74 U1.99 U2.1 U2.2 U2.3 U2.4 U2.7 U4.5 U6.7 U7.8 U7.12 U12.3 U13.3 U14.3 U15.3 U16.3 U17.3 U18.3 U19.3 U20.7 U21.1 U21.10 U21.19 U22.1 U22.10 U22.19 U23.1 U26.7 U27.7 U28.8 U28.12 U29.7 U30.8 U30.12 | length 10365.7
  Top Layer w10: P2.3@620,981.31 668.5,1029.81 668.5,1131.31 702,1164.81 R10.2@702,1247.89 ; v1(899.5,976.31) 913.84,990.66 U22.10@913.84,1073.52 ; U22.19@1118.57,849.11 1118.57,790.93 1150.5,759 v1(1150.5,757.31) ; U22.1@1144.16,1073.52 1144.16,1111.66 1154.82,1122.31 1200.5,1122.31 1215.5,1107.31 v1(1215.5,1081.31) ; v1(1280.5,526.31) R77.1@1280.5,585.81 ; U2.4@1409.36,1650.57 1409.36,1570.17 1479.86,1570.17 1486.13,1576.44 U2.1@1486.13,1650.57 ; 1434.95,1571.62 U2.3@1434.95,1650.57 ; v1(1445.5,1368.81) 1460.54,1383.85 U2.7@1460.54,1432.06 ; 1460.54,1571.13 U2.2@1460.54,1650.57 ; U12.3@1523.5,752.36 v1(1523.5,809.86) ; R6.1@1544.68,1923.31 v1(1599,1923.31) ; v1(1682,1843.81) R73.2@1746.52,1843.81 ; v1(1682,1923.41) R72.2@1746.52,1923.41 ; v1(1682,2003.02) R71.2@1746.52,2003.02 ; v1(1682,2082.61) R70.2@1746.52,2082.61 ; v1(1682,2162.22) R69.2@1746.52,2162.22 ; v1(1682,2241.81) R68.2@1746.52,2241.81 ; U13.3@1707.02,752.27 v1(1707,809.86) ; v1@1833.04,1195.78 U1.74@1927.74,1195.78 ; U14.3@1890.5,752.32 v1(1890.5,809.86) ; v1(1986.5,1937.81) 2004.84,1956.16 U21.10@2049.8,1956.16 ; v1(2007.5,1624.81) U1.49@2007.46,1708.57 ; U21.1@2049.8,2186.47 2100.34,2186.47 2115.5,2171.31 v1(2115.5,2139.31) ; U15.3@2073.88,752.27 v1(2073.88,809.86) ; U16.3@2257.5,752.46 v1(2257.5,809.86) ; U21.19@2274.2,2160.88 2317.07,2160.88 2326,2169.81 v1(2326,2223.81) ; v1(2429.5,1054.81) 2440.54,1065.85 U1.99@2440.54,1116.06 ; v1(2429.5,1787.81) 2440.54,1776.78 U1.27@2440.54,1708.57 ; v1(2431.5,1308.81) 2475.94,1353.26 U1.10@2520.26,1353.26 ; U17.3@2440.5,752.5 v1(2440.5,809.86) ; U18.3@2624,752.43 v1(2624,809.86) ; U19.3@2807.5,752.36 v1(2807.5,809.86) ; v1@2877.42,1264.89 C3.2@2877.42,1338.81 C2.2@2955.5,1338.81 ; U4.5@3101.5,724.32 v1(3101.5,809.86) ; v1(4046.5,2004.81) 4058.77,1992.54 U20.7@4121.75,1992.54 ; v1(4071.5,1067.81) 4095.23,1091.54 U6.7@4095.23,1144.52 ; R31.2@4092,673.99 v1(4092,739.81) ; R31.2@4092.59,673.39 4042.09,622.89 4042.09,512.39 4056.09,498.39 Q1.2@4092.85,498.39 ; v1(4496.5,665.39) U7.12@4496.5,733.98 ; U29.7@4504.5,1144.84 v1(4504.5,1211.81) ; v1(4646,457.39) U7.8@4646,545.31 ; v1(4849,96.32) D23.1@4849,169.3 ; C63.2@4942.59,526.23 4942.59,505.22 v1(4981.5,466.32) 5021.09,505.91 C62.1@5021.09,526.23 ; v1(5025.5,96.32) D24.1@5025.5,162.8 ; U30.12@5211.63,1172.42 v1(5211.63,1246.31) ; v1(5274,96.32) D21.1@5274,166.05 ; U30.8@5361.59,983.41 5361.59,913.72 5374.5,900.81 5410,900.81 5423,913.81 v1(5423,971.31) ; C61.2@5370.59,526.23 5370.59,504.47 v1(5408.75,466.32) 5448.59,506.16 C60.1@5448.59,526.23 ; v1(5459.5,96.32) D22.1@5459.5,168.8 ; C56.2@5570.08,1050.89 v1(5633.5,1050.89) ; v1(5706,96.32) D19.1@5706,169.8 ; C59.2@5798.59,526.23 5798.59,503.72 v1(5836,466.32) 5876.59,506.91 C58.1@5876.59,526.23 ; v1(5880.5,96.32) D20.1@5880.5,161.8 ; U26.7@5982.59,982.41 5982.59,922.72 6007,898.31 6054.5,898.31 6076,919.81 v1(6076,971.31) C47.2@6076,1050.81
  Top Layer w20: v2(490.5,679.31) C22.2@584.79,679.31 ; C22.2@617.4,679.31 v2(702.5,679.31) ; U23.1@4914,1954.31 4914,1894.31 4977,1831.31 5170.02,1831.31 D12.2@5241.59,1902.89 ; C25.1@5193.17,2160.81 v2(5314.5,2160.81) ; C26.1@5194.17,2044.81 v2(5314.5,2044.81) ; D12.2@5241.67,1902.81 v2(5338.5,1902.81) L2.2@5447.98,1902.81
  Bottom Layer w10: v1(490.5,554.81) C24.2@601.02,554.81 ; C21.2@1150.5,805.81 v1(1150.5,757.31) 1150.5,706.31 1167,689.81 D11.1@1193.5,689.81 ; v1(1445.5,1368.81) C12.2@1445.5,1425.81 ; v1(1833,1195.81) C8.2@1887.5,1195.81 ; C5.2@1967,1401.31 2007.5,1441.81 v1(2007.5,1494.31) ; C11.2@1975,1670.31 1975,1638.31 1988.5,1624.81 v1(2007.5,1624.81) ; v1(2115.5,2139.31) C20.2@2166,2139.31 ; v1(2192,1511.31) R1.2@2251,1511.31 ; C1.2@2219,1368.16 v1(2219,1310.81) 2219,1286.31 C6.2@2271,1234.31 ; R1.2@2252.84,1513.16 C4.1@2335,1513.16 ; C9.2@2375,1082.31 2402,1082.31 v1(2429.5,1054.81) ; C7.2@2375.5,1308.81 v1(2431.5,1308.81) C10.2@2492.5,1308.81 ; v1(2807.5,809.86) 2862.45,809.86 2871,801.31 C15.1@2871,763.16 ; v1(4235,524.81) C18.2@4235,597.23 ; C13.2@4249.5,1006.81 v1(4249.5,1067.81) ; v1(4451,2027.31) C19.2@4451,2081.31 ; C51.2@4740,1068.31 v1(4740,1130.31) ; C57.2@4927,1050.81 v1(4927,971.31) 4927,918.31 4943.5,901.81 4995,901.81 5011.59,918.41 U27.7@5011.59,982.41 ; C55.2@4942.59,526.23 4942.59,505.22 v1(4981.5,466.32) 5021.09,505.91 C54.1@5021.09,526.23 ; v1(5011.5,1346.31) R125.2@5011.49,1401.31 ; v1(5025.5,96.32) D17.1@5025.5,169.8 ; v1(5189.5,1346.31) R127.2@5189.5,1401.06 ; v1(5209,96.32) D18.1@5209,169.49 ; v1(5368,1346.31) R130.2@5368,1401.29 ; C53.2@5370.59,526.23 5370.59,504.47 v1(5408.75,466.32) 5448.59,506.16 C52.1@5448.59,526.23 ; v1(5423,971.31) C48.2@5423,1050.81 ; v1(5459.5,96.32) D15.1@5459.5,160.99 ; v1(5546.5,1346.31) R121.2@5546.5,1401.11 ; v1(5623.5,96.32) D16.1@5623.5,159.8 ; U28.8@5633.5,982.5 v1(5633.5,1050.89) ; v1(5724.7,1346.31) R119.2@5724.7,1401.18 ; U28.12@5783.5,1171.48 v1(5783.5,1246.31) ; C50.2@5798.59,526.23 5798.59,503.72 v1(5836,466.32) 5876.59,506.91 C49.1@5876.59,526.23 ; v1(5880.5,96.32) D13.1@5880.5,164.99 ; v1(5902.9,1346.31) R124.2@5902.9,1401.25 ; v1(6058.5,96.32) D14.1@6058.5,169.8
  Bottom Layer w20: C66.2@5195.85,2160.81 v2(5314.5,2160.81) ; C23.2@5200.35,2044.81 v2(5314.5,2044.81)
  Bottom Layer w26: C5.2@1967,1401.31 2030.5,1337.81 v1(2030.5,1327.31) v1(2030.5,1292.81) v1(2030.5,1258.31) ; C6.2@2271,1234.31 v1(2362,1234.31) v1(2362,1183.31)
  Bottom Layer w38: C64.2@4747.5,271.24 v2(4747.5,364.32) v2(4747.5,426.82) ; v2(6080,473.82) v2(6080,406.32) 6168.59,317.72 C65.2@6168.59,317.65
  other v1: 1470,1129.81 2878,1264.31 1409,1569.81
GP: C17.1 K1.1 K2.1 K3.1 K4.1 P3.44 P3.45 P3.46 P7.9 P7.27 P7.28 | length 11926.8
  Bottom Layer w10: 2714,-400.46 P3.44@2843.67,-270.79 ; P7.28@4869.5,-170.79 4969.5,-70.79 P7.9@5144.85,-70.79
  Bottom Layer w50: K3.1@177.17,1929.13 57.62,1809.59 57.62,749.46 K4.1@177.17,629.92 57.62,510.38 57.62,142.69 142.69,57.62 2023.59,57.62 2048.5,32.71 2048.5,-134.18 2085.1,-170.79 P3.45@2478.53,-170.79 2774.93,-467.18 5884.9,-467.18 6397.64,45.55 K2.1@6397.64,629.92 6542.5,774.78 6542.5,1360.81 C17.1@6397,1506.31 6397,1928.5 K1.1@6397.64,1929.13 ; 4330.53,-464.68 P3.46@4330.53,-170.79 ; 4869.5,-461.68 P7.28@4869.5,-170.79
IN: P6.9 R67.2 R75.1 | length 454.9
  Top Layer w10: R67.2@1043.5,649.81 1072.5,649.81 1083,639.31 1083,421.5 1102.36,402.14 P6.9@1102.36,275.59 ; 1083.18,585.81 R75.1@1122.5,585.81
IN_2_ARM: D11.3 R76.1 U1.85 | length 1490.3
  Top Layer w10: R76.1@1201.5,649.81 1233.5,681.82 v1(1233.5,757.31) 1233.5,873.31 1249,888.81 1326.11,888.81 1383.3,946 1400.69,946 2111.08,946 2164.94,999.87 U1.85@2164.94,1116.06
  Bottom Layer w10: D11.3@1233.5,603.83 v1(1233.5,757.31)
INH/SC2: D8.3 P3.13 U17.2 | length 1137.4
  Top Layer w10: v1(2440.86,418.89) U17.2@2440.86,494.27
  Bottom Layer w10: D8.3@2390.37,284.01 2390.37,368.4 v1(2440.86,418.89) 2479.09,380.66 2479.09,75.39 2549.09,5.39 2911.59,5.39 2933.82,-16.83 P3.13@2933.82,-70.79
INH/SC2_2_ARM: R47.2 TP32.1 U1.93 U17.4 | length 471.6
  Top Layer w10: TP32.1@2322,836.31 2364.05,836.31 v1(2390.5,809.86) U17.4@2390.5,752.5 ; TP32.1@2322.43,836.31 U1.93@2322.43,1116.06
  Bottom Layer w10: R47.2@2390.5,754.81 v1(2390.5,809.86)
IPM_FAULT: P4.22 R52.1 TP13.1 U20.1 | length 1467.8
  Top Layer w10: v1(4001,2145.81) U20.1@4121.48,2145.81 ; U20.1@4121.75,2146.09 4175.27,2146.09 4186.5,2157.31 TP13.1@4186.5,2227.31
  Bottom Layer w10: P4.22@3031.5,2066.93 3031.5,2185.81 3118,2272.31 3928,2272.31 R52.1@4001,2199.31 v1(4001,2145.81)
IPM_FAULT_2_ARM: R11.2 U1.31 | length 2272
  Top Layer w10: v1(2361.5,1640.31) U1.31@2361.5,1708.28 ; v1(2362,1824) 2362,1845.5 2495.81,1979.31 3519.5,1979.31 3576,1922.81 4171.5,1922.81 R11.2@4250,1844.31
  Bottom Layer w10: v1@2362,1640.81 v1(2362,1824)
IV: C39.2 R107.2 TP23.1 U1.16 | length 757.1
  Top Layer w10: U1.16@2520.26,1471.37 2939.56,1471.37 2954.5,1486.31 TP23.1@3011.04,1486.31 3061,1486.31 3101.77,1527.08 C39.2@3175.57,1527.08 ; C39.2@3173.73,1528.92 R107.2@3173.73,1607.66
IV+: P5.2 R108.2 R109.2 | length 2441
  Top Layer w10: R109.2@3979,1595.51 3998.81,1615.31 R108.2@4055.5,1615.31 4097,1656.81 5915,1656.81 6082.68,1824.49 P5.2@6082.68,2066.93
IV-: P5.1 R106.2 R108.1 | length 2595.6
  Top Layer w10: R106.2@3979,1517.35 4012.96,1551.31 R108.1@4055.5,1551.31 4129,1624.81 5929.5,1624.81 6122.05,1817.36 P5.1@6122.05,2145.67
IW: C45.2 R115.2 TP24.1 U1.17 | length 851.2
  Top Layer w10: U1.17@2520.26,1491.06 2883.07,1491.06 TP24.1@2918.33,1526.31 3074.13,1526.31 3128.5,1580.68 3128.5,1641.17 C45.2@3175.57,1688.24 ; C45.2@3173.73,1690.08 R115.2@3173.73,1768.81
IW+: P5.4 R116.2 R117.2 | length 2315
  Top Layer w10: R117.2@3981,1753.81 R116.2@4055.5,1753.81 4088.5,1720.81 5888.39,1720.81 6003.94,1836.36 P5.4@6003.94,2066.93
IW-: P5.3 R114.2 R116.1 | length 2443.8
  Top Layer w10: R114.2@3979,1673.66 4039.35,1673.66 R116.1@4055.5,1689.81 5901.5,1689.81 6043.31,1831.62 P5.3@6043.31,2145.67
LED_POWER: R60.2 U1.58 U21.2 | length 1360.4
  Top Layer w10: R60.2@1544.42,2003.81 v1(1599,2003.81) 1632,1970.81 1632,1641.18 1762.44,1510.74 U1.58@1927.74,1510.74 ; v1(1967,2195.56) 1967,2173.81 1979.93,2160.88 U21.2@2049.8,2160.88
  Bottom Layer w10: v1(1599,2003.81) 1634.5,2039.31 1708,2039.31 1791.5,2122.81 1932.5,2122.81 1967,2157.31 v1(1967,2195.56)
LED_POWER_2_KEY: P6.4 R57.2 | length 2567.6
  Top Layer w10: P6.4@905.51,354.33 905.51,410.49 851,465 795.5,465 748.5,512 748.5,687.68 852,791.18 852,2090.18 1003.71,2241.89 R57.2@1480.5,2241.89
LED_RUN: R61.2 U1.57 U21.3 | length 1339.4
  Top Layer w10: R61.2@1544.37,2082.81 v1(1599,2082.81) 1651,2030.81 1651,1649.06 1769.63,1530.43 U1.57@1927.74,1530.43 ; v1(1940,2172.81) 1977.52,2135.29 U21.3@2049.8,2135.29
  Bottom Layer w10: v1(1599,2082.81) 1636.5,2120.31 1697.5,2120.31 1750,2172.81 v1(1940,2172.81)
LED_RUN_2_KEY: P6.5 R58.2 | length 2643.2
  Top Layer w10: P6.5@944.88,275.59 944.88,413.12 868.5,489.5 815.5,489.5 767.5,537.5 767.5,679.81 871,783.31 871,2082.31 1007,2218.31 1424.48,2218.31 R58.2@1480.5,2162.29
LV: P4.18 R54.1 TP11.1 U20.5 | length 1687.6
  Top Layer w10: TP11.1@4028,2227.31 3998,2227.31 3955,2184.31 3955,2099.31 3979,2075.31 v1(4001,2075.31) 4028,2075.31 4059.59,2043.72 U20.5@4121.75,2043.72
  Bottom Layer w10: P4.18@3188.98,2066.93 3188.98,2187.29 3236,2234.31 3893.74,2234.31 3944,2184.06 3944,2092.31 3961,2075.31 v1(4001,2075.31) 4102,2075.31 4163.8,2137.11 R54.1@4163.8,2199.31
LV_2_ARM: R138.2 U1.34 | length 1863.2
  Top Layer w10: v1(2286,1624.81) 2286,1645.81 2302.74,1662.56 U1.34@2302.74,1708.57 ; v1(2307.5,1880.31) 2444.5,2017.31 3698,2017.31 R138.2@3741,1974.31
  Bottom Layer w10: v1(2286,1624.81) 2286,1651.31 2307.5,1672.81 v1(2307.5,1880.31)
NetC2_1: C2.1 R3.1 U1.13 Y1.2 | length 717.2
  Top Layer w10: U1.13@2520.26,1412.31 2664,1412.31 R3.1@2737.5,1338.81 2770.5,1371.81 2986.5,1371.81 C2.1@3019.5,1338.81 2986.53,1305.85 Y1.2@2986.53,1192.31
NetC3_1: C3.1 R3.2 U1.12 Y1.1 | length 490.1
  Top Layer w10: U1.12@2520.26,1392.63 2619.68,1392.63 R3.2@2673.5,1338.81 2722.5,1289.81 2813.42,1289.81 ; Y1.1@2794.4,1192.31 2794.4,1236.72 2813.42,1255.74 C3.1@2813.42,1338.81
NetC14_1: C14.1 D1.1 R13.1 R16.1 U4.2 | length 724.4
  Top Layer w10: U4.2@3002.09,505.22 3002.09,407.89 C14.1@2980.59,386.39 2980.59,272.25 R16.1@3039.19,213.65 3081.17,213.65 3092.5,202.32 3092.5,136.82 3105.67,123.65 R13.1@3145.29,123.65
  Bottom Layer w10: v1(2980.59,317.32) 3038.59,259.32 D1.1@3038.59,123.39
NetC14_2: C14.2 D1.3 R12.1 R13.2 U4.1 | length 749.1
  Top Layer w10: R12.1@2933.09,213.65 2916.59,230.15 C14.2@2916.59,386.39 2952.09,421.89 U4.1@2952.09,505.22 ; v1(3040.5,317.32) 3144.17,213.65 R13.2@3145.29,213.65
  Bottom Layer w10: D1.3@2999.22,210.01 2916.59,292.64 v1(2916.59,317.32) 2944.09,344.82 3013,344.82 v1(3040.5,317.32)
NetC16_1: C16.1 D2.2 R18.1 R19.1 U4.4 | length 963.9
  Top Layer w10: U4.4@3102.09,505.22 3102.09,442.89 C16.1@3158.59,386.39 ; C16.1@3158.5,386.3 v1(3158.5,317.32) 3197.5,278.32 3197.5,177.54 R18.1@3251.39,123.65 3294.33,123.65 3304,133.32 3304,198.82 3318.83,213.65 R19.1@3357.49,213.65
  Bottom Layer w10: v1(3158.5,317.32) 3158.5,216.32 3251.42,123.39 D2.2@3357.85,123.39
NetC16_2: C16.2 D2.3 R17.1 R18.2 U4.3 | length 957.2
  Top Layer w10: U4.3@3052.09,505.22 3052.09,428.7 3094.5,386.3 v1(3094.5,317.32) ; R18.2@3235.5,229.54 v1(3235.5,317.32) ; R18.2@3251.39,213.65 3310.06,272.32 3404.93,272.32 R17.1@3463.59,213.65
  Bottom Layer w10: v1(3094.5,317.32) 3124.5,347.32 3205.5,347.32 v1(3235.5,317.32) 3343,317.32 3397.22,263.09 D2.3@3397.22,210.01
NetC32_1: C32.1 R97.1 R99.2 U25.2 | length 783.1
  Top Layer w10: C32.1@3311.16,1282.47 R97.1@3311.16,1204.81 3368.66,1147.31 3751.16,1147.31 R99.2@3808.66,1204.81 ; C32.1@3313,1284.31 3338,1309.31 3371.5,1309.31 3395.5,1333.31 U25.2@3395.5,1390.83
NetC32_2: C32.2 R97.2 R100.1 U25.1 | length 409
  Top Layer w10: R100.1@3245.04,1453.81 3336.5,1453.81 3345.5,1444.81 U25.1@3345.5,1390.83 3345.5,1335.31 3338.5,1328.31 3293,1328.31 C32.2@3249,1284.31 ; R97.2@3247.16,1204.81 C32.2@3247.16,1282.47
NetC33_2: C33.2 C34.1 R98.2 R99.1 | length 306.6
  Top Layer w10: R99.1@3746.5,1206.66 C33.2@3746.5,1284.31 ; C33.2@3749,1284.31 v1(3808.5,1343.81)
  Bottom Layer w10: v1(3808.5,1343.81) 3808.5,1304.81 C34.1@3828.5,1284.81 ; C34.1@3829,1284.31 R98.2@3906.5,1284.31
NetC34_2: C34.2 C36.2 R102.2 R103.1 | length 346.5
  Top Layer w10: R103.1@3648.21,1204.81 C36.2@3648.21,1282.47 ; C36.2@3650.05,1284.31 3670.5,1284.31 3730,1343.81 v1(3753,1343.81)
  Bottom Layer w10: R102.2@3686.5,1284.31 C34.2@3764,1284.31 ; v1(3753,1343.81) 3764.5,1332.31 C34.2@3764.5,1284.81
NetC37_2: C37.2 R103.2 R104.2 U25.3 | length 414.4
  Top Layer w10: C37.2@3402.02,1284.31 3445.5,1327.79 U25.3@3445.5,1390.83 ; C37.2@3403.86,1282.47 R104.2@3403.86,1204.81 3442.36,1166.31 3545.71,1166.31 R103.2@3584.21,1204.81
NetC38_1: C38.1 R105.2 R106.1 U25.6 | length 706.6
  Top Layer w10: U25.6@3595.5,1390.83 3595.5,1332.81 3608,1320.31 3677.63,1320.31 3728.63,1371.31 3853,1371.31 3878,1396.31 3878,1480.35 R106.1@3915,1517.35 3957.04,1475.31 C38.1@4055.5,1475.31 ; R105.2@3979,1439.2 3979,1474.31
NetC38_2: C38.2 R105.1 R107.1 U25.7 | length 1113.2
  Top Layer w10: R107.1@3237.73,1607.66 3270.65,1607.66 3309.5,1568.81 3309.5,1526.31 3357,1478.81 3519.5,1478.81 3538.5,1497.81 3632.5,1497.81 v1(3645.5,1484.81) U25.7@3645.5,1390.83 ; R105.1@3915.5,1438.7 v1(3915.5,1382.81) 4027,1382.81 C38.2@4055.5,1411.31
  Bottom Layer w10: v1(3645.5,1484.81) 3677,1453.31 3845,1453.31 v1(3915.5,1382.81)
NetC40_2: C40.2 R109.1 R110.1 U25.5 | length 615.6
  Top Layer w10: U25.5@3545.5,1390.83 v1(3545.5,1461.31) ; v1(3688.5,1421.81) 3715,1395.31 3800,1395.31 3810.5,1405.81 C40.2@3810.5,1439.2 ; C40.2@3808.66,1441.04 R110.1@3808.66,1517.35 3886.81,1595.51 R109.1@3915,1595.51
  Bottom Layer w10: v1(3545.5,1461.31) 3585,1421.81 v1(3688.5,1421.81)
NetC44_1: C44.1 R113.2 R114.1 U25.13 | length 746.4
  Top Layer w10: U25.13@3395.5,1579.8 3395.5,1667.86 C44.1@3413.57,1685.93 ; R113.2@3413.57,1766.97 C44.1@3413.57,1685.93 ; v1(3462.5,1726.31) 3462.5,1705.81 3442.61,1685.93 C44.1@3413.57,1685.93 ; v1(3862,1673.31) R114.1@3914.65,1673.31
  Bottom Layer w10: v1(3462.5,1726.31) 3809,1726.31 v1(3862,1673.31)
NetC44_2: C44.2 R113.1 R115.1 U25.14 | length 293.1
  Top Layer w10: R115.1@3237.73,1768.81 R113.1@3347.73,1768.81 ; U25.14@3345.5,1579.8 C44.2@3345.5,1681.86 ; C44.2@3349.57,1685.93 R113.1@3349.57,1766.97
NetC46_2: C46.2 R117.1 R118.1 U25.12 | length 676.1
  Top Layer w10: U25.12@3445.5,1579.8 3445.5,1654.81 3476.61,1685.93 C46.2@3511.57,1685.93 3513.41,1687.77 R118.1@3513.41,1768.81 3549.41,1804.81 3862,1804.81 R117.1@3915,1751.81